# Altium PCB oscilostor.PcbDoc (part 1 of 2)
Units mm, origin at the board's own origin, x right, y up, seen from the top; angles counter-clockwise.
Board outline 113.66 x 82.55 mm, 2 copper layers (Top Layer, Bottom Layer); 162 components, 136 nets, 565 pads, 67 vias.
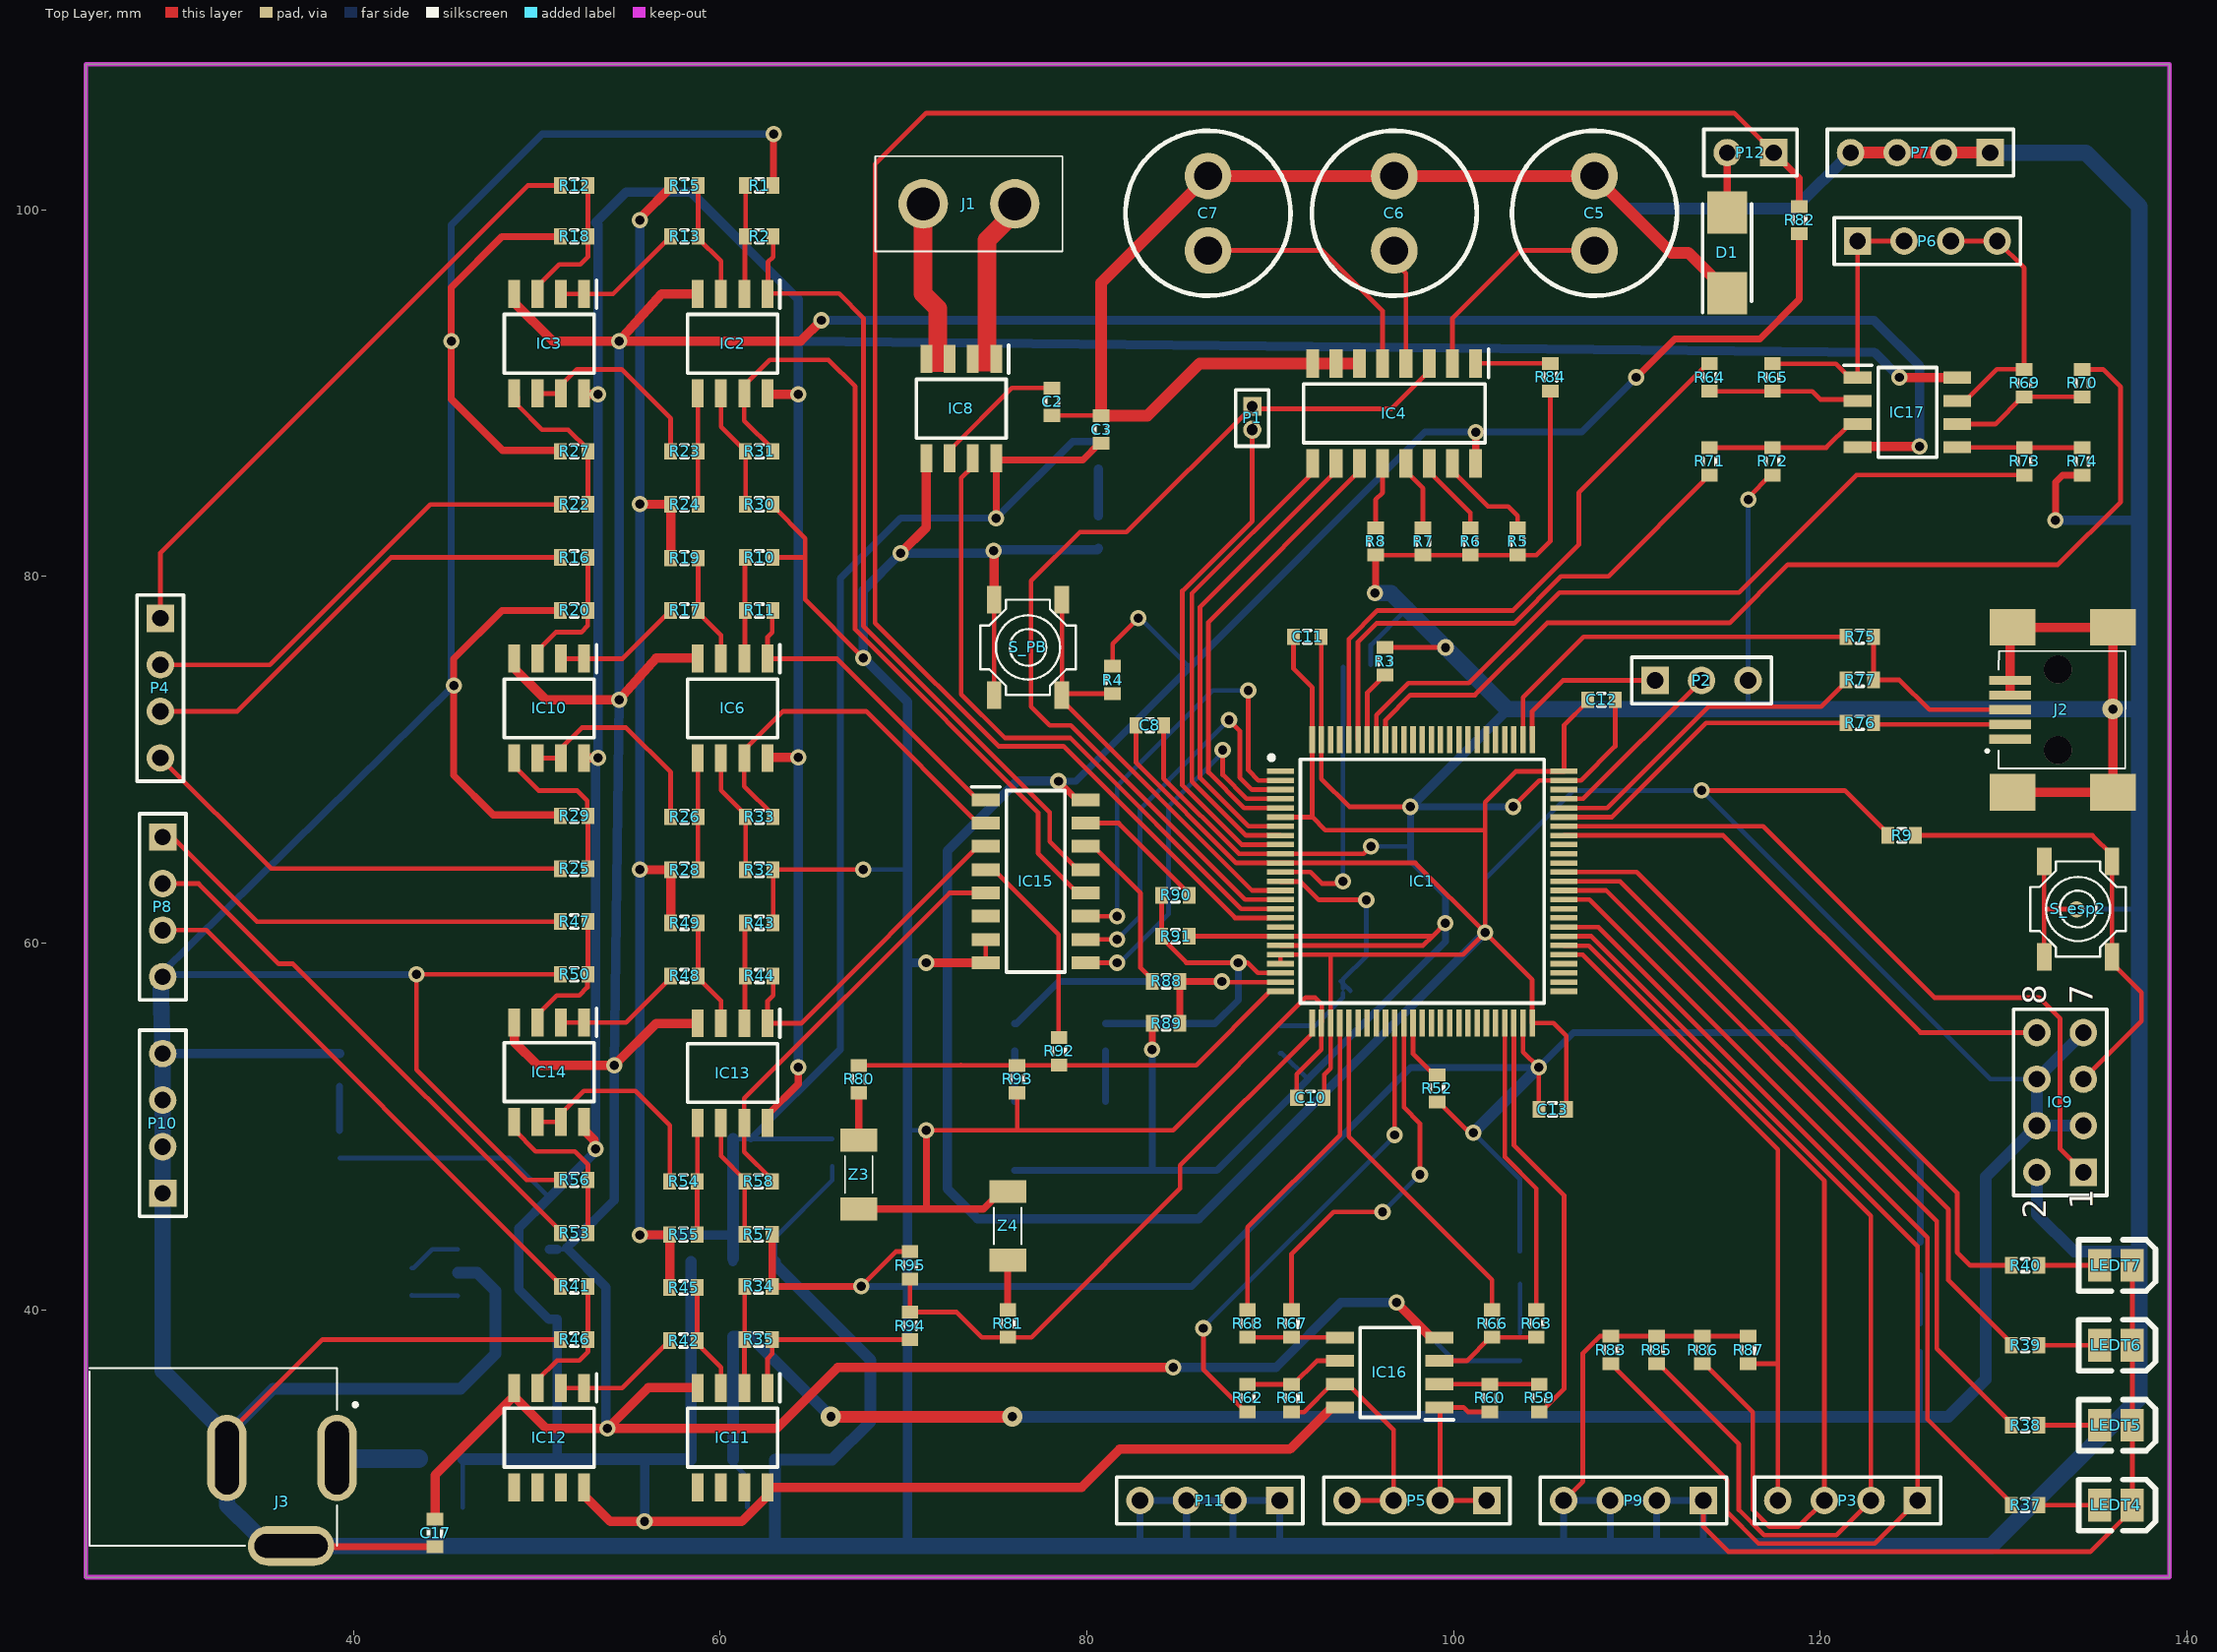
[diagram p0: Top Layer view]
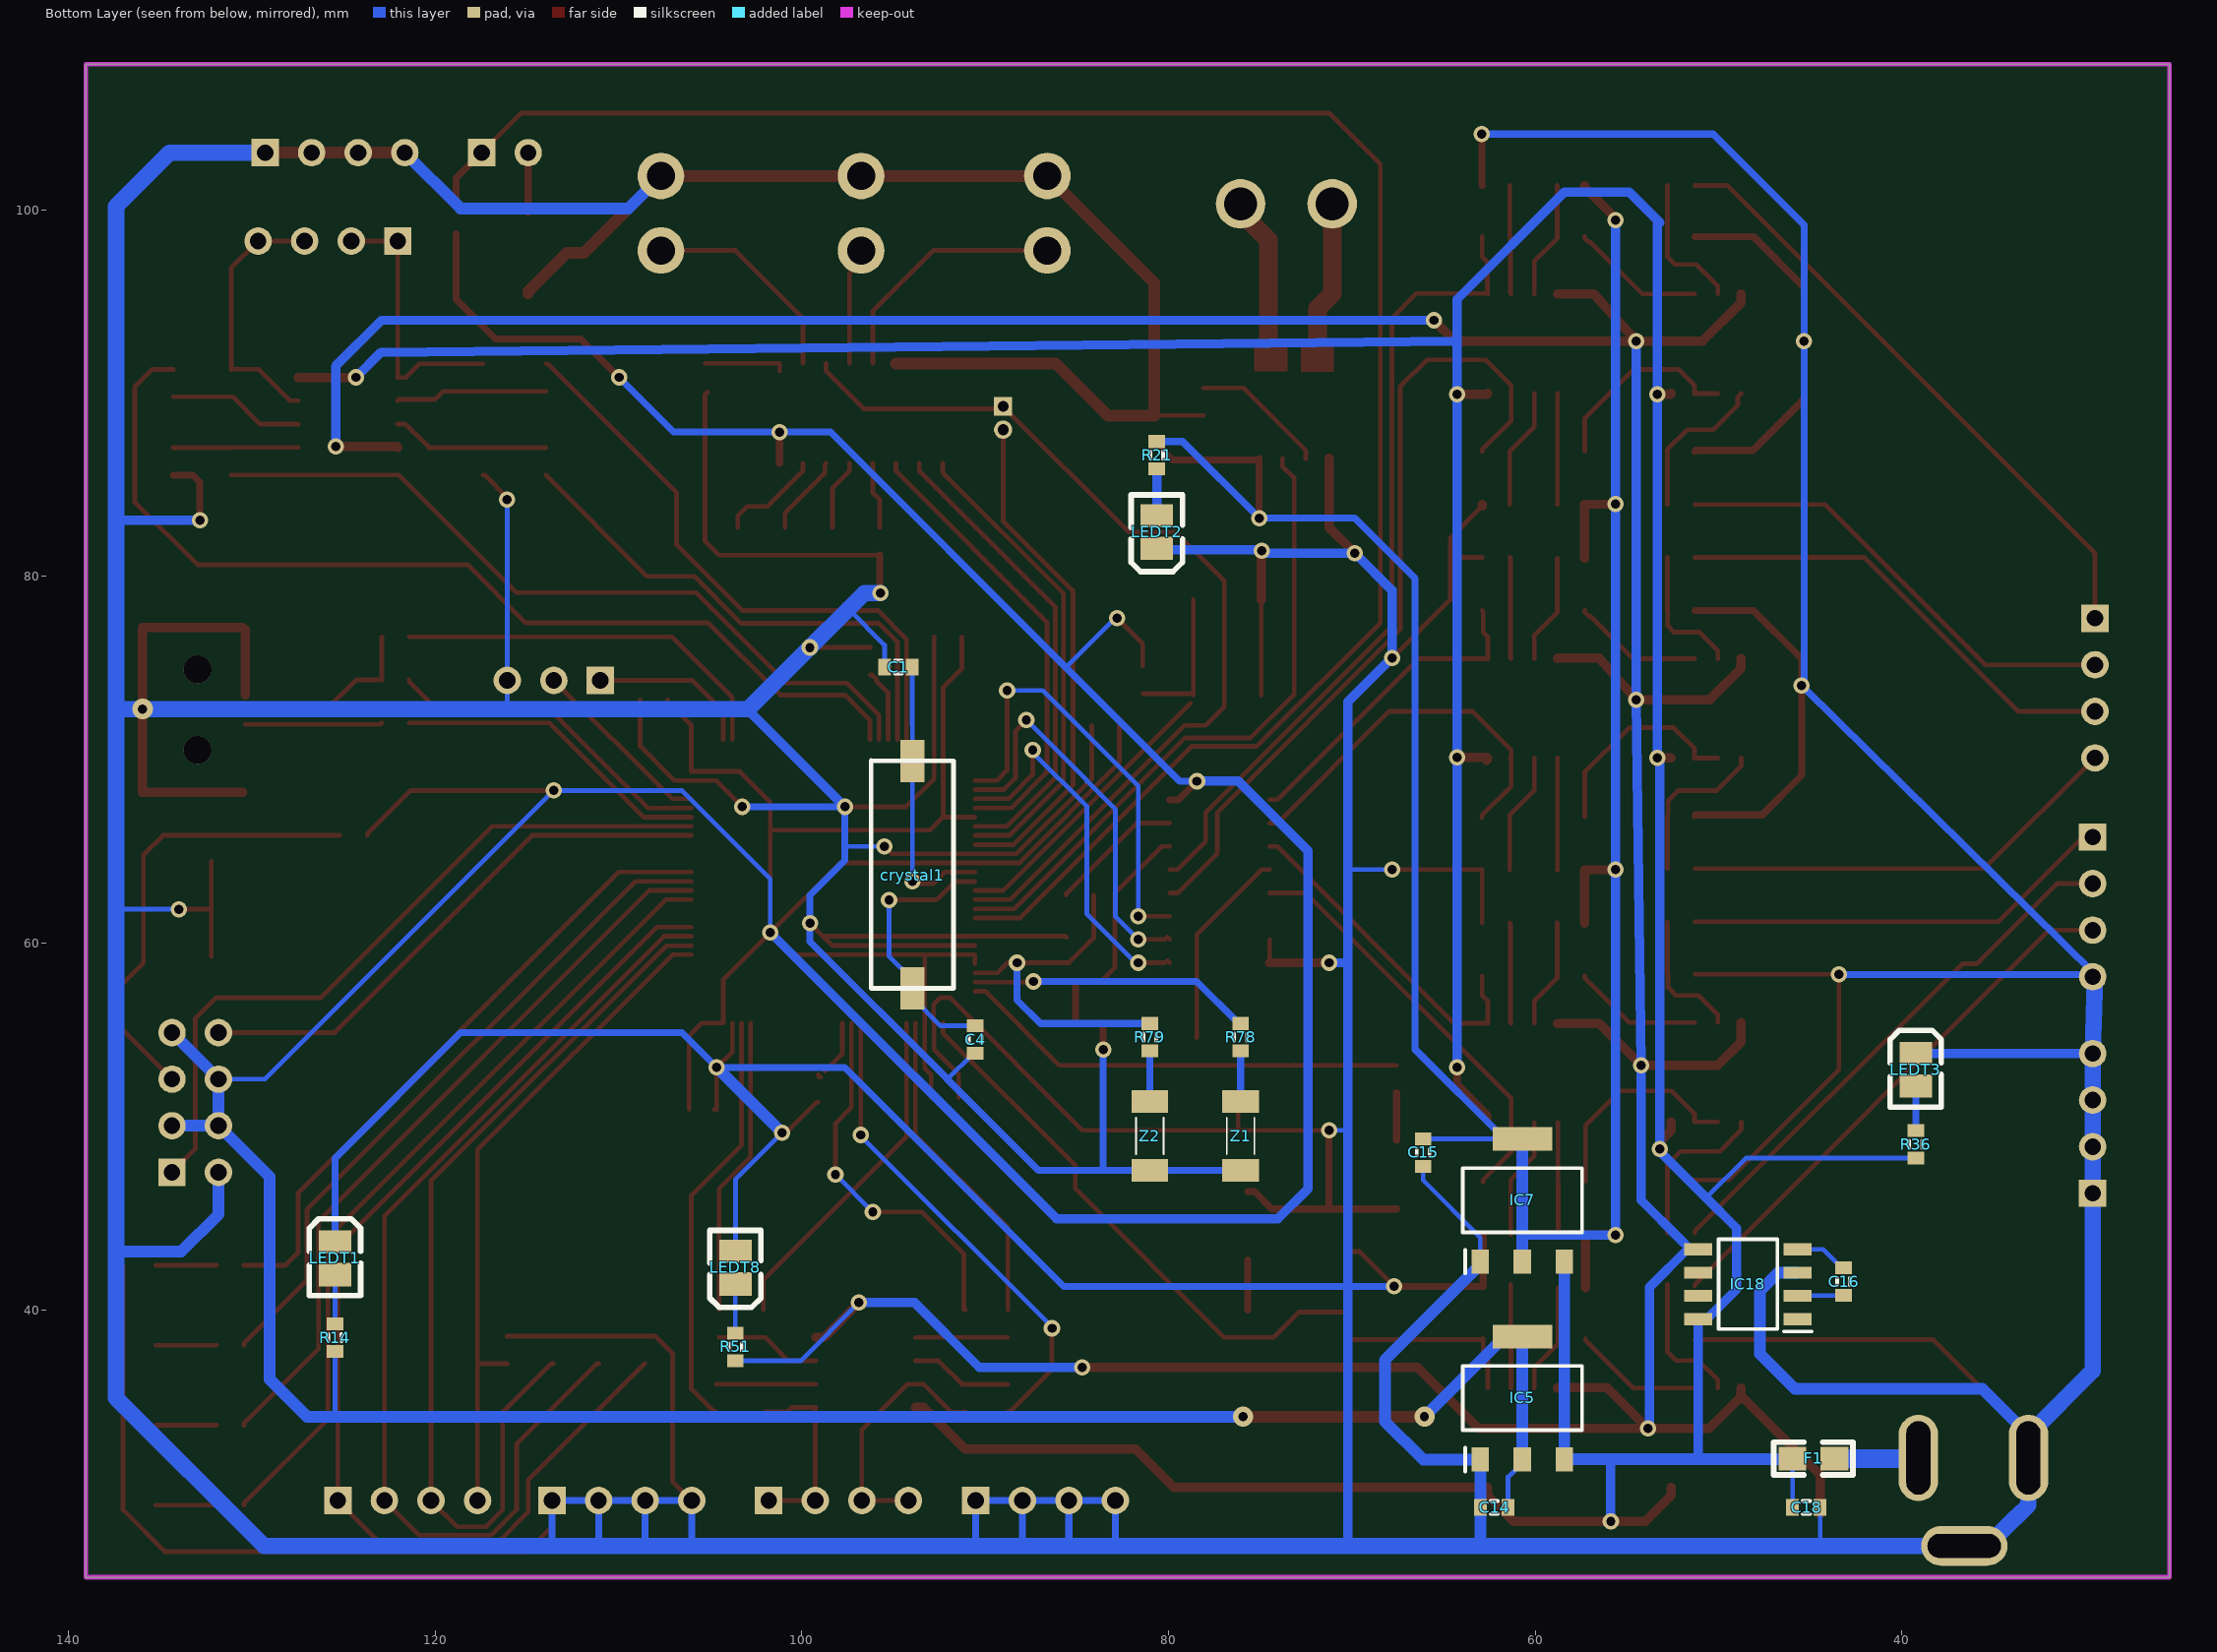
[diagram p1: Bottom Layer view, seen from below]

## Layer stack, top to bottom
Top Solder: solder mask 0.0102, Solder Resist, Dk 3.5
Top Layer: signal copper 0.0356
Dielectric 1: dielectric 0.32, FR-4, Dk 4.8
Bottom Layer: signal copper 0.0356
Bottom Solder: solder mask 0.0102, Solder Resist, Dk 3.5

## Board outline
25.4,25.4 139.065,25.4 139.065,107.95 25.4,107.95

## Design rules (kind name [scope] priority, off if disabled: settings)
Clearance [All] p1: gap=0.2 ignorepadtopadclearanceinfootprint=FALSE
PolygonConnect [All] p1: connectstyle=Relief reliefconductorwidth=0.254 reliefentries=4 polygonreliefangle="90 Angle" airgapwidth=0.254
RoutingVias [All] p1: holewidth=0.711 width=1.27 viastyle="Through Hole" minholewidth=0.711 minwidth=1.27 maxholewidth=0.711 maxwidth=1.27
SolderMaskExpansion [All] p1: expansion=0.102
Width [All] p1: maxlimit=1.27 minlimit=0.254 preferedwidth=0.254 minimp=50.000000 maximp=50.000000 favimp=50.000000
30 further rules are at their usual default settings.

## Components (designator, comment, footprint, x,y, rotation, side; value= is the part's Value field where it differs from the comment)
C1 "C0603" J1-0603 94.742,75.057 r180 bottom value=20pF
C2 "Cap" J1-0603 78.105,89.535 r90 top value=1nF
C3 "Cap" J1-0603 80.787,88.011 r270 top value=100nF
C4 "C0603" J1-0603 90.551,54.737 r90 bottom value=20pF
C5 "Cap" "Deep Cap gerdaloo" 107.696,101.85 r270 top value=47uF
C6 "Cap" "Deep Cap gerdaloo" 96.774,101.85 r270 top value=470uF
C7 "Cap" "Deep Cap gerdaloo" 86.614,101.85 r270 top value=2.2uF
C8 "C0603" J1-0603 83.439,71.882 r0 top value=0.1uF
C10 "C0603" J1-0603 92.202,51.562 r180 top value=0.1uF
C11 "C0603" J1-0603 92.031,76.708 r0 top value=0.1uF
C12 "C0603" J1-0603 108.077,73.279 r0 top value=0.1uF
C13 "C0603" J1-0603 105.41,50.927 r180 top value=0.1uF
C14 "C0603" J1-0603 62.23,29.21 r0 bottom value=0.1uF
C15 "C0603" J1-0603 66.119,48.574 r270 bottom value=0.1uF
C16 "Cap" J1-0603 43.18,41.529 r270 bottom value=10uF
C17 "Cap" J1-0603 44.45,27.813 r90 top value=10uF
C18 "C0603" J1-0603 45.212,29.21 r180 bottom value=10uF
crystal1 "clockProducerDeep" "smd CRYSTAL" 91.73,69.931 r0 bottom
D1 "1N4007" DIOM5327X242N 114.935,97.663 r90 top
F1 "Fuse 1" 0805 44.831,31.877 r0 bottom
IC1 "STM32F103VCT6" QFP50P1600X1600X160-100N 98.298,63.373 r0 top
IC2 "LM2904D" SOIC127P600X175-8N 60.682,92.698 r270 top
IC3 "LM2904D" SOIC127P600X175-8N 50.673,92.698 r270 top
IC4 "74HC4051D" SOIC127P600X175-16N 96.774,88.9 r270 top
IC5 "AMS1117-3.3" SOT229P700X180-4N 60.706,35.179 r90 bottom
IC6 "LM2904D" SOIC127P600X175-8N 60.682,72.805 r270 top
IC7 "AMS1117-5" SOT229P700X180-4N 60.706,45.974 r90 bottom
IC8 "ACS712ELCTR-05B-T" SOIC127P600X175-8N 73.152,89.154 r270 top
IC9 "ESP-01" HDR2X4 134.366,47.498 r90 top
IC10 "LM2904D" SOIC127P600X175-8N 50.673,72.805 r270 top
IC11 "LM2904D" SOIC127P600X175-8N 60.682,33.02 r270 top
IC12 "LM2904D" SOIC127P600X175-8N 50.673,33.02 r270 top
IC13 "LM2904D" SOIC127P600X175-8N 60.682,52.913 r270 top
IC14 "LM2904D" SOIC127P600X175-8N 50.673,52.959 r270 top
IC15 "74HC4053D" SOIC127P600X175-16N 77.216,63.373 r0 top
IC16 "LM2904D" SOIC127P600X175-8N 96.52,36.576 r180 top
IC17 "LM2904D" SOIC127P600X175-8N 124.77,88.95 r0 top
IC18 "ICL7660ACBAZA" SOIC127P600X175-8N 48.399,41.39 r0 bottom
J1 "XT30PB" XT30PB 76.073,100.33 r270 top
J2 "usb type B" 0474910001 129.869,71.13 r180 top
J3 "1613_20" 161320 34.798,31.115 r0 top
LEDT1 "" 3518 125.476,42.799 r90 bottom
LEDT2 "" 3518 80.645,82.423 r270 bottom
LEDT3 "" 3518 39.243,53.086 r90 bottom
LEDT4 "" 3518 136.144,29.337 r0 top
LEDT5 "" 3518 136.144,33.697 r0 top
LEDT6 "" 3518 136.144,38.058 r0 top
LEDT7 "" 3518 136.144,42.418 r0 top
LEDT8 "" 3518 103.632,42.291 r270 bottom
P1 "MHDR1X2" MHDR1X2 89.027,89.281 r270 top
P2 "Header 3" HDR1X3 110.998,74.33 r0 top
P3 "Header 4" HDR1X4 125.317,29.591 r180 top
P4 "Header 4" HDR1X4 29.464,77.724 r270 top
P5 "Header 4" HDR1X4 101.814,29.591 r180 top
P6 "Header 4" HDR1X4 122.047,98.298 r0 top
P7 "Header 4" HDR1X4 129.286,103.124 r180 top
P8 "Header 4" HDR1X4 29.591,65.786 r270 top
P9 "Header 4" HDR1X4 113.633,29.591 r180 top
P10 "Header 4" HDR1X4 29.591,46.355 r90 top
P11 "Header 4" HDR1X4 90.519,29.591 r180 top
P12 "Header 2" HDR1X2 117.475,103.124 r180 top
R1 "Res1" J1-0603 62.139,101.329 r0 top value=24.9K
R2 "Res1" J1-0603 62.139,98.552 r180 top value=8.2K
R3 "Res1" J1-0603 96.266,75.376 r90 top value=10K
R4 "Res1" J1-0603 81.407,74.358 r90 top value=10K
R5 "Res1" J1-0603 103.505,81.915 r270 top value=10k
R6 "Res1" J1-0603 100.923,81.915 r270 top value=1.5k
R7 "Res1" J1-0603 98.34,81.915 r270 top value=330
R8 "Res1" J1-0603 95.758,81.915 r270 top value=100K
R9 "Res1" J1-0603 124.46,65.873 r180 top value=10K
R10 "Res1" J1-0603 62.139,81.041 r0 top value=24.9K
R11 "Res1" J1-0603 62.139,78.147 r180 top value=8.2K
R12 "Res1" J1-0603 52.046,101.329 r0 top value=1M
R13 "Res1" J1-0603 58.051,98.552 r0 top value=10K
R14 "Res1" j1-0603 125.476,38.469 r90 bottom value=330
R15 "Res1" J1-0603 58.051,101.329 r0 top value=10K
R16 "Res1" J1-0603 52.046,81.041 r0 top value=1M
R17 "Res1" J1-0603 58.051,78.147 r0 top value=10K
R18 "Res1" J1-0603 52.046,98.552 r0 top value=1M
R19 "Res1" J1-0603 58.051,81.005 r0 top value=10K
R20 "Res1" J1-0603 52.046,78.147 r0 top value=1M
R21 "Res1" j1-0603 80.645,86.614 r270 bottom value=330
R22 "Res1" J1-0603 52.046,83.934 r0 top value=1M
R23 "Res1" J1-0603 58.051,86.828 r0 top value=10K
R24 "Res1" J1-0603 58.051,83.934 r0 top value=10K
R25 "Res1" J1-0603 52.046,64.06 r0 top value=1M
R26 "Res1" J1-0603 58.051,66.887 r0 top value=10K
R27 "Res1" J1-0603 52.046,86.828 r0 top value=100K
R28 "Res1" J1-0603 58.051,63.993 r0 top value=10K
R29 "Res1" J1-0603 52.046,66.945 r0 top value=100K
R30 "Res1" J1-0603 62.139,83.934 r0 top value=24.9K
R31 "Res1" J1-0603 62.139,86.828 r180 top value=8.2K
R32 "Res1" J1-0603 62.139,63.993 r0 top value=24.9K
R33 "Res1" J1-0603 62.139,66.887 r180 top value=8.2K
R34 "Res1" J1-0603 62.091,41.274 r0 top value=24.9K
R35 "Res1" J1-0603 62.091,38.371 r180 top value=8.2K
R36 "Res1" j1-0603 39.243,49.022 r90 bottom value=330
R37 "Res1" j1-0603 131.191,29.337 r0 top value=330
R38 "Res1" j1-0603 131.191,33.697 r0 top value=330
R39 "Res1" j1-0603 131.191,38.058 r0 top value=330
R40 "Res1" j1-0603 131.191,42.418 r0 top value=330
R41 "Res1" J1-0603 52.046,41.274 r0 top value=1M
R42 "Res1" J1-0603 58.003,38.313 r0 top value=10K
R43 "Res1" J1-0603 62.139,61.1 r0 top value=24.9K
R44 "Res1" J1-0603 62.139,58.206 r180 top value=8.2K
R45 "Res1" J1-0603 58.003,41.207 r0 top value=10K
R46 "Res1" J1-0603 52.046,38.371 r0 top value=1M
R47 "Res1" J1-0603 52.046,61.176 r0 top value=1M
R48 "Res1" J1-0603 58.051,58.206 r0 top value=10K
R49 "Res1" J1-0603 58.051,61.1 r0 top value=10K
R50 "Res1" J1-0603 52.046,58.291 r0 top value=1M
R51 "Res1" j1-0603 103.632,37.973 r90 bottom value=330
R52 "Res1" J1-0603 99.108,52.07 r270 top value=10K
R53 "Res1" J1-0603 52.046,44.177 r0 top value=1M
R54 "Res1" J1-0603 58.003,46.994 r0 top value=10K
R55 "Res1" J1-0603 58.003,44.101 r0 top value=10K
R56 "Res1" J1-0603 52.046,47.08 r0 top value=100K
R57 "Res1" J1-0603 62.091,44.107 r0 top value=24.9K
R58 "Res1" J1-0603 62.091,46.992 r180 top value=8.2K
R59 "Res1" J1-0603 104.687,35.179 r90 top value=33K
R60 "Res1" J1-0603 101.981,35.179 r90 top value=75K
R61 "Res1" J1-0603 91.174,35.179 r270 top value=75K
R62 "Res1" J1-0603 88.773,35.179 r270 top value=33K
R63 "Res1" J1-0603 104.521,39.243 r270 top value=25K
R64 "Res1" J1-0603 113.975,90.855 r270 top value=33K
R65 "Res1" J1-0603 117.404,90.855 r270 top value=75K
R66 "Res1" J1-0603 102.108,39.243 r270 top value=10K
R67 "Res1" J1-0603 91.174,39.243 r90 top value=25K
R68 "Res1" J1-0603 88.773,39.243 r270 top value=10K
R69 "Res1" J1-0603 131.138,90.551 r90 top value=75K
R70 "Res1" J1-0603 134.295,90.551 r90 top value=33K
R71 "Res1" J1-0603 113.975,86.283 r90 top value=10K
R72 "Res1" J1-0603 117.404,86.283 r90 top value=25K
R73 "Res1" J1-0603 131.144,86.283 r270 top value=10K
R74 "Res1" J1-0603 134.295,86.283 r90 top value=25K
R75 "Res1" J1-0603 122.174,76.708 r180 top value=1.5k
R76 "Res1" J1-0603 122.174,72.009 r180 top value=22
R77 "Res1" J1-0603 122.174,74.358 r180 top value=22
R78 "Res1" J1-0603 76.073,54.864 r90 bottom value=330
R79 "Res1" J1-0603 81.026,54.864 r90 bottom value=330
R80 "Res1" J1-0603 67.564,52.578 r90 top value=330
R81 "Res1" J1-0603 75.692,39.243 r270 top value=330
R82 "Res1" J1-0603 118.872,99.441 r270 top value=1K
R83 "Res1" J1-0603 108.585,37.805 r270 top value=10K
R84 "Res1" J1-0603 105.283,90.875 r90 top value=1M
R85 "Res1" J1-0603 111.083,37.805 r270 top value=10K
R86 "Res1" J1-0603 113.58,37.805 r270 top value=10K
R87 "Res1" J1-0603 116.078,37.805 r270 top value=10K
R88 "Res1" J1-0603 84.328,57.912 r0 top value=10K
R89 "Res1" J1-0603 84.328,55.626 r180 top value=10K
R90 "Res1" J1-0603 84.836,62.611 r180 top value=10K
R91 "Res1" J1-0603 84.836,60.373 r0 top value=10K
R92 "Res1" J1-0603 78.486,54.102 r270 top value=10K
R93 "Res1" J1-0603 76.2,52.578 r270 top value=10K
R94 "Res1" J1-0603 70.358,39.116 r90 top value=10K
R95 "Res1" J1-0603 70.358,42.418 r90 top value=10K
S_esp2 "SW-PB" button 133.985,61.873 r270 top
S_PB "SW-PB" button 76.705,76.146 r270 top
Z1 "diode" TZMC4V7GS08 76.073,49.479 r90 bottom
Z2 "diode" TZMC4V7GS08 81.026,49.479 r90 bottom
Z3 "diode" TZMC4V7GS08 67.564,47.371 r90 top
Z4 "diode" TZMC4V7GS08 75.692,44.577 r270 top

## Footprints (in the part's own frame and the unit in brackets; to place one, negate y for a bottom-side part, rotate by r counter-clockwise, add the part's x,y. Pads: shape width x height; smd on the part's side, far side on the other; paste and mask are expansions set on the pad)
0805 [mil]
  rect 60x50 smd: 1(-45,0) 2(45,0)
  silkscreen extent -85,-35 85,35
3518 [mil]
  rect 50x70 smd: 1(35,0) 2(-35,0)
  silkscreen extent -80,-55 85,55
161320 [mm]
  oval 2.159x4.699 hole 4 slot 1.3 at 0 deg: 1(4.3,0.8) 3(-1.7,0.8)
  oval 4.699x2.159 hole 1.3 slot 4 at 0 deg: 2(1.8,-4)
  silkscreen extent -9.2,-4 5.4,5.7
0474910001 [mm]
  rect 2.3x0.5 smd: 1(-0.5,0) 2(-0.5,-0.8) 3(-0.5,-1.6) 4(-0.5,-2.4) 5(-0.5,-3.2)
  round 1.524 hole 1.524: 7(-3.1,0.6) 8(-3.1,-3.8)
  rect 2.5x2 smd: MP1(-6.1,2.9) MP2(-0.625,2.9) MP3(-0.625,-6.1) MP4(-6.1,-6.1)
  silkscreen extent -6.8,-4.8 0.8,1.6
button [mm]
  rect 1.5x0.8 smd: 1(-2.587,1.939) 1(2.613,1.939) 2(-2.587,-1.761) 2(2.613,-1.761)
  silkscreen extent -2.59,-2.51 2.61,2.69, body extent -2.59,-2.51 2.64,2.69, height 2.2
"Deep Cap gerdaloo" [mil]
  round 100 hole 60: 1(0,0) 2(160,0)
  silkscreen extent -97,-177 257,177
DIOM5327X242N [mm]
  rect 2.3x2.15 smd: 1(-2.2,0) 2(2.2,0)
  silkscreen extent -3.27,-1.34 2.65,1.34, body extent -2.65,-1.34 2.65,1.34, height 2.42
HDR1X2 [mm] "Connector; Header; 2 Position"
  rect 1.5x1.5 hole 0.9: 1(0,0)
  round 1.5 hole 0.9: 2(2.54,0)
  silkscreen extent -1.27,-1.27 3.81,1.27
HDR1X3 [mm] "Connector; Header; 3 Position"
  rect 1.5x1.5 hole 0.9: 1(0,0)
  round 1.5 hole 0.9: 2(2.54,0) 3(5.08,0)
  silkscreen extent -1.27,-1.27 6.35,1.27
HDR1X4 [mm] "Connector; Header; 4 Position"
  rect 1.5x1.5 hole 0.9: 1(0,0)
  round 1.5 hole 0.9: 2(2.54,0) 3(5.08,0) 4(7.62,0)
  silkscreen extent -1.27,-1.27 8.89,1.27
HDR2X4 [mm] "Connector; Header; 4x2 Position"
  rect 1.5x1.5 hole 0.9: 1(0,0)
  round 1.5 hole 0.9: 2(0,2.54) 3(2.54,0) 4(2.54,2.54) 5(5.08,0) 6(5.08,2.54) 7(7.62,0) 8(7.62,2.54)
  silkscreen extent -1.27,-1.27 8.89,3.81
J1-0603 [mm] "Chip Resistor, Body 1.6x0.8mm, IPC High Density"
  rect 0.7x0.9 smd: 1(-0.75,0) 2(0.75,0)
  silkscreen extent -0.2,-0.35 0.2,0.35, body extent -0.85,-0.48 0.85,0.48, height 0.9
j1-0603 [mm] "Chip Resistor, Body 1.6x0.8mm, IPC High Density"
  rect 0.7x0.9 smd: 1(-0.75,0) 2(0.75,0)
  silkscreen extent -0.2,-0.35 0.2,0.35, body extent -0.85,-0.48 0.85,0.48, height 0.9
MHDR1X2 [mm] "Connector; Header; 2 Position"
  rect 1x1 hole 0.6: 1(0,0)
  round 1 hole 0.6: 2(1.27,0)
  silkscreen extent -0.9,-0.9 2.17,0.9
QFP50P1600X1600X160-100N [mm]
  rect 1.475x0.3 smd: 1(-7.738,6) 2(-7.738,5.5) 3(-7.738,5) 4(-7.738,4.5) 5(-7.738,4) 6(-7.738,3.5) 7(-7.738,3) 8(-7.738,2.5) 9(-7.738,2) 10(-7.738,1.5) 11(-7.738,1) 12(-7.738,0.5) 13(-7.738,0) 14(-7.738,-0.5) 15(-7.738,-1) 16(-7.738,-1.5) 17(-7.738,-2) 18(-7.738,-2.5) 19(-7.738,-3) 20(-7.738,-3.5) 21(-7.738,-4) 22(-7.738,-4.5) 23(-7.738,-5) 24(-7.738,-5.5) 25(-7.738,-6) 51(7.738,-6) 52(7.738,-5.5) 53(7.738,-5) 54(7.738,-4.5) 55(7.738,-4) 56(7.738,-3.5) 57(7.738,-3) 58(7.738,-2.5) 59(7.738,-2) 60(7.738,-1.5) 61(7.738,-1) 62(7.738,-0.5) 63(7.738,0) 64(7.738,0.5) 65(7.738,1) 66(7.738,1.5) 67(7.738,2) 68(7.738,2.5) 69(7.738,3) 70(7.738,3.5) 71(7.738,4) 72(7.738,4.5) 73(7.738,5) 74(7.738,5.5) 75(7.738,6)
  rect 0.3x1.475 smd: 26(-6,-7.738) 27(-5.5,-7.738) 28(-5,-7.738) 29(-4.5,-7.738) 30(-4,-7.738) 31(-3.5,-7.738) 32(-3,-7.738) 33(-2.5,-7.738) 34(-2,-7.738) 35(-1.5,-7.738) 36(-1,-7.738) 37(-0.5,-7.738) 38(0,-7.738) 39(0.5,-7.738) 40(1,-7.738) 41(1.5,-7.738) 42(2,-7.738) 43(2.5,-7.738) 44(3,-7.738) 45(3.5,-7.738) 46(4,-7.738) 47(4.5,-7.738) 48(5,-7.738) 49(5.5,-7.738) 50(6,-7.738) 76(6,7.738) 77(5.5,7.738) 78(5,7.738) 79(4.5,7.738) 80(4,7.738) 81(3.5,7.738) 82(3,7.738) 83(2.5,7.738) 84(2,7.738) 85(1.5,7.738) 86(1,7.738) 87(0.5,7.738) 88(0,7.738) 89(-0.5,7.738) 90(-1,7.738) 91(-1.5,7.738) 92(-2,7.738) 93(-2.5,7.738) 94(-3,7.738) 95(-3.5,7.738) 96(-4,7.738) 97(-4.5,7.738) 98(-5,7.738) 99(-5.5,7.738) 100(-6,7.738)
  silkscreen extent -8.35,-6.65 6.65,6.87, body extent -8,-8 8,8, height 1.6
"smd CRYSTAL" [mm]
  rect 1.3x2.3 smd: 1(2.25,0) 2(2.25,12.4)
  silkscreen extent 0,-0.03 4.5,12.4
SOIC127P600X175-8N [mm]
  rect 1.525x0.65 smd: 1(-2.712,1.905) 2(-2.712,0.635) 3(-2.712,-0.635) 4(-2.712,-1.905) 5(2.712,-1.905) 6(2.712,-0.635) 7(2.712,0.635) 8(2.712,1.905)
  silkscreen extent -3.47,-2.45 1.6,2.58, body extent -3,-2.45 3,2.45, height 1.75
SOIC127P600X175-16N [mm]
  rect 1.55x0.7 smd: 1(-2.725,4.445) 2(-2.725,3.175) 3(-2.725,1.905) 4(-2.725,0.635) 5(-2.725,-0.635) 6(-2.725,-1.905) 7(-2.725,-3.175) 8(-2.725,-4.445) 9(2.725,-4.445) 10(2.725,-3.175) 11(2.725,-1.905) 12(2.725,-0.635) 13(2.725,0.635) 14(2.725,1.905) 15(2.725,3.175) 16(2.725,4.445)
  silkscreen extent -3.5,-4.95 1.6,5.15, body extent -3,-4.95 3,4.95, height 1.75
SOT229P700X180-4N [mm]
  rect 1.3x0.95 smd: 1(-3.35,2.29) 2(-3.35,0) 3(-3.35,-2.29)
  rect 1.3x3.25 smd: 4(3.35,0)
  silkscreen extent -4,-3.25 1.75,3.25, body extent -3.5,-3.25 3.5,3.25, height 1.8
TZMC4V7GS08 [mm]
  rect 1.25x2 smd: 1(-1.875,0) 2(1.875,0)
  silkscreen extent -1,-0.75 1,0.75
XT30PB [mm]
  round 2.7 hole 1.8: 1(0,0) 2(0,-5)
  silkscreen extent -2.6,-7.6 2.6,2.6, body extent -2.6,-7.6 2.6,2.6, height 10.66

## Part data
C1 C4 C8 C10 C11 C12 C13 C14 C15 C18: "Ceramic Chip Capacitor - Standard", PackageDocument=Mar-2001, Code_IPC="1608 [0603]", Code_JEITA=0603, ComponentLink1Description="Manufacturer Link", ComponentLink1URL=http://www.kemet.com/, ComponentLink2Description=Datasheet, ComponentLink2URL=http://www.kemet.com/kemet/web/homepage/kechome.nsf/vapubfilesname/F3102TA.pdf/$file/F3102TA.pdf, DatasheetDocument=Mar-2001, LatestRevisionDate=19-Mar-2004, LatestRevisionNote="Silkscreen size reduced.", Note="Footprint corresponds to dimensions for bulk cassette packaging. This case size has tightened tolerances.", PackageReference=0603, Published=17-Jul-2002, Publisher="Altium Limited"
C2 C3 C5 C6 C7 C16 C17: "Capacitor", LatestRevisionDate=17-Jul-2002, LatestRevisionNote="Re-released for DXP Platform.", PackageDescription="Radial Cap, Thru-Hole; 2 Leads; 0.3 in Pin Spacing", PackageReference=RAD-0.3, Published=8-Jun-2000, Publisher="Altium Limited"
crystal1: library part "deep crystal"
D1: "Diode", Manufacturer_Name=Shikues, Datasheet Link=https://datasheet.lcsc.com/szlcsc/SK-1N4007_C126233.pdf, Height=2.42mm, Manufacturer_Part_Number=1N4007
F1: "Fuse", LatestRevisionDate=17-Jul-2002, LatestRevisionNote="Re-released for DXP Platform.", PackageDescription="Thru-Hole; 2 Leads", PackageReference=PIN-W2/E2.8, Published=8-Jun-2000, Publisher="Altium Limited"
IC1: "Integrated Circuit", Manufacturer_Name=STMicroelectronics, Mouser Part Number=511-STM32F103VCT6, Arrow Part Number=STM32F103VCT6, Arrow Price/Stock=https://www.arrow.com/en/products/stm32f103vct6/stmicroelectronics, Datasheet Link=https://www.st.com/resource/en/datasheet/stm32f103rc.pdf, Height=1.6mm, Manufacturer_Part_Number=STM32F103VCT6, Mouser Price/Stock=https://www.mouser.co.uk/ProductDetail/STMicroelectronics/STM32F103VCT6?qs=%252BB84zevwoRDW1rpMEiZMCg%3D%3D
IC2 IC3 IC6 IC10 IC11 IC12 IC13 IC14 IC16 IC17: "Integrated Circuit", Manufacturer_Name="Texas Instruments", Mouser Part Number=595-LM2904D, Arrow Part Number=LM2904D, Arrow Price/Stock=https://www.arrow.com/en/products/lm2904d/texas-instruments, Datasheet Link=http://www.ti.com/lit/ds/symlink/lm2904.pdf, Height=1.75mm, Manufacturer_Part_Number=LM2904D, Mouser Price/Stock=https://www.mouser.co.uk/ProductDetail/Texas-Instruments/LM2904D?qs=3pnr37ZAbK8kLA26cC%252BYEg%3D%3D
IC4: "Integrated Circuit", Manufacturer_Name=Nexperia, Mouser Part Number=N/A, Datasheet Link=https://assets.nexperia.com/documents/data-sheet/74HC_HCT4051.pdf, Height=1.75mm, Manufacturer_Part_Number=74HC4051D, Mouser Price/Stock=https://www.mouser.com/Search/Refine.aspx?Keyword=N%2FA
IC5 IC7: library part AMS1117-1.5, "Integrated Circuit", Manufacturer_Name=ams, Datasheet Link=http://www.advanced-monolithic.com/pdf/ds1117.pdf, Height=1.8mm, Manufacturer_Part_Number=AMS1117-1.5
IC8: "Integrated Circuit", Manufacturer_Name="Sharp Microelectronics", Datasheet Link=https://www.allegromicro.com/~/media/Files/Datasheets/ACS712-Datasheet.ashx, Height=1.75mm, Manufacturer_Part_Number=ACS712ELCTR-05B-T
IC9: "Integrated Circuit", Manufacturer_Name=Ai-Thinker, Datasheet Link=http://wiki.ai-thinker.com/_media/esp8266/esp8266_series_modules_user_manual_v1.1.pdf, Height=2mm, Manufacturer_Part_Number=ESP-01
IC15: "Integrated Circuit", Manufacturer_Name=Toshiba, Mouser Part Number=757-74HC4053D, Datasheet Link=http://toshiba.semicon-storage.com/info/docget.jsp?did=54976&prodName=74HC4053D, Height=1.75mm, Manufacturer_Part_Number=74HC4053D, Mouser Price/Stock=https://www.mouser.co.uk/ProductDetail/Toshiba/74HC4053D/?qs=xhbEVWpZdWclq3MrSw2ZoQ%3D%3D
IC18: "Integrated Circuit", Manufacturer_Name="Renesas Electronics", Mouser Part Number=968-ICL7660ACBAZA, Datasheet Link=https://www.renesas.com/en-us/www/doc/datasheet/icl7660s-a.pdf, Height=1.75mm, Manufacturer_Part_Number=ICL7660ACBAZA, Mouser Price/Stock=https://www.mouser.co.uk/ProductDetail/Renesas-Intersil/ICL7660ACBAZA?qs=9fLuogzTs8LeW4me0pfrFQ%3D%3D
J1: "Connector", Manufacturer_Name=Amass, Datasheet Link=https://www.tme.eu/Document/4acc913878197f8c2e30d4b8cdc47230/XT30UPB%20SPEC.pdf, Height=10.7mm, Manufacturer_Part_Number=XT30PB
J2: library part 0474910001, "Connector", Manufacturer_Name=Molex, Arrow Part Number=0474910001, Arrow Price/Stock=https://www.arrow.com/en/products/0474910001/molex, Datasheet Link=https://www.molex.com/pdm_docs/sd/474910001_sd.pdf, Height=2.94mm, Manufacturer_Part_Number=0474910001
J3: "Connector", Manufacturer_Name=LUMBERG, Manufacturer_Part_Number="1613 20", Datasheet Link=http://www.farnell.com/datasheets/2349122.pdf, Height=7mm
LEDT1 LEDT2 LEDT3 LEDT4 LEDT5 LEDT6 LEDT7 LEDT8: library part LED3, "Typical BLUE SiC LED", PackageDocument=16-Apr-2002, DatasheetDocument=16-Apr-2002, LatestRevisionDate=17-Dec-2003, LatestRevisionNote="PCB Footprint replaced.", PackageReference=3.5X2.8X1.9, Published=8-Jun-2000, Publisher="Altium Limited"
P1 P12: "Header, 2-Pin", LatestRevisionDate=17-Jul-2002, LatestRevisionNote="Re-released for DXP Platform.", Publisher="Altium Limited"
P2: "Header, 3-Pin", LatestRevisionDate=17-Jul-2002, LatestRevisionNote="Re-released for DXP Platform.", Publisher="Altium Limited"
P3 P4 P5 P6 P7 P8 P9 P10 P11: "Header, 4-Pin", LatestRevisionDate=17-Jul-2002, LatestRevisionNote="Re-released for DXP Platform.", Publisher="Altium Limited"
R1 R2 R3 R4 R5 R6 R7 R8 R9 R10 R11 R12 R13 R14 R15 R16 R17 R18 R19 R20 R21 R22 R23 R24 R25 R26 R27 R28 R29 R30 R31 R32 R33 R34 R35 R36 R37 R38 R39 R40 R41 R42 R43 R44 R45 R46 R47 R48 R49 R50 R51 R52 R53 R54 R55 R56 R57 R58 R59 R60 R61 R62 R63 R64 R65 R66 R67 R68 R69 R70 R71 R72 R73 R74 R75 R76 R77 R78 R79 R80 R81 R82 R83 R84 R85 R86 R87 R88 R89 R90 R91 R92 R93 R94 R95: "Resistor", LatestRevisionDate=17-Jul-2002, LatestRevisionNote="Re-released for DXP Platform.", PackageReference=AXIAL-0.3, Published=8-Jun-2000, Publisher="Altium Limited"
  R1 R2 R3 R4 R5 R6 R7 R8 R9 R10 R11 R12 R13 R15 R16 R17 R18 R19 R20 R22 R23 R24 R25 R26 R27 R28 R29 R30 R31 R32 R33 R34 R35 R41 R42 R43 R44 R45 R46 R47 R48 R49 R50 R52 R53 R54 R55 R56 R57 R58 R59 R60 R61 R62 R63 R64 R65 R66 R67 R68 R69 R70 R71 R72 R73 R74 R75 R76 R77 R78 R79 R80 R81 R82 R83 R84 R85 R86 R87 R88 R89 R90 R91 R92 R93 R94 R95: PackageDescription="Axial Device, Thru-Hole; 2 Leads; 0.3 in Pin Spacing"
S_esp2 S_PB: "Switch", LatestRevisionDate=17-Jul-2002, LatestRevisionNote="Re-released for DXP Platform.", PackageReference=SPST-2, Published=24-Mar-1999, Publisher="Altium Limited"
Z1 Z2 Z3 Z4: library part TZMC4V7-GS08, "Zener Diode", Manufacturer_Name=Vishay, Mouser Part Number=78-TZMC4.7, Arrow Part Number=TZMC4V7-GS08, Arrow Price/Stock=https://www.arrow.com/en/products/tzmc4v7-gs08/vishay, Datasheet Link=https://www.vishay.com/docs/84122/tzm.pdf, Manufacturer_Part_Number=TZMC4V7-GS08, Mouser Price/Stock=https://www.mouser.com/Search/Refine.aspx?Keyword=78-TZMC4.7

## Via types
v1: diameter 0.889, hole 0.508, Top Layer to Bottom Layer, 48 vias
v2: diameter 0.9, hole 0.5, Top Layer to Bottom Layer, 16 vias
v3: diameter 1.1, hole 0.5, Top Layer to Bottom Layer, 2 vias
v4: diameter 1.143, hole 0.5, Top Layer to Bottom Layer, 1 vias

## Nets (pads, with @x,y where several pads share a name; then routed paths per layer and width w, separated by ;. In a path a pad name is that pad's centre, name@x,y a point inside that pad or via, vN(x,y) a via of type N, cw(c..) or ccw(c..) an arc to the next point about the centre after c; other vN are vias at no path point)
+3.3v: C8.1 C10.1 C11.1 C12.1 C13.1 C14.1 IC1.6 IC1.11 IC1.21 IC1.22 IC1.28 IC1.50 IC1.75 IC1.100 IC4.16 IC5.2 IC5.4 IC9.3 IC9.4 IC9.6 IC9.7 IC15.16 R4.2 R9.2 R14.1 R82.2 | length 384.3
  Top Layer w0.254: R4.2 81.407,76.327 v1(82.804,77.724) ; C8.1 82.689,69.845 88.161,64.373 IC1.11 97.933,64.373 v1(101.727,60.579) ; IC1.22 IC1.21 93.298,59.373 ; IC1.6 92.284,66.873 92.298,66.887 ; C11.1 91.281,74.962 92.298,73.945 IC1.100 92.298,66.887 ; C10.1 92.952,52.832 93.298,53.178 IC1.28 93.298,59.373 ; C13.1 106.16,54.943 105.468,55.635 IC1.50 104.298,58.008 v1(101.727,60.579) ; C12.1 107.327,73.179 106.036,71.888 IC1.75 103.409,69.373 101.727,67.691 101.727,66.167 ; v1(113.538,68.326) 121.357,68.326 123.71,65.973 R9.2 ; 92.298,66.887 93.018,66.167 101.727,66.167 ; 93.298,59.373 100.521,59.373 v1(101.727,60.579) ; v1(101.727,60.579) 101.727,66.167
  Top Layer w0.381: v2(78.455,68.834) 79.471,67.818 IC15.16 ; IC4.16 v1(101.219,87.884) ; v1(109.982,90.866) 112.08,92.964 116.713,92.964 118.872,95.123 R82.2
  Top Layer w0.635: v3(66.047,34.163) v3(75.946,34.163)
  Bottom Layer w0.254: IC5.2 60.706,31.654 61.48,30.88 C14.1 ; v1(82.804,77.724) 82.907,77.724 85.598,75.033 ; v1(101.727,60.579) 101.727,63.5 106.553,68.326 v1(113.538,68.326) 129.286,52.578 IC9.6 ; 125.476,34.163 R14.1
  Bottom Layer w0.381: v2(78.455,68.834) 79.399,68.834 85.598,75.033 98.449,87.884 v1(101.219,87.884) 107,87.884 v1(109.982,90.866)
  Bottom Layer w0.508: v2(78.455,68.834) 76.2,68.834 72.39,65.024 72.39,46.609 74.041,44.958 86.106,44.958 v1(101.727,60.579)
  Bottom Layer w0.635: IC5.2 IC5.4 61.681,38.529 v3(66.047,34.163) ; v3(75.946,34.163) 125.476,34.163 127,34.163 129.032,36.195 129.032,47.244 IC9.4 ; IC9.3 IC9.4 ; IC9.7 IC9.6 IC9.4
+5v: C3.2 C15.1 IC7.2 IC7.4 IC8.8 R15.1 R19.1 R21.1 R24.1 R28.1 R45.1 R49.1 R55.1 | length 147.9
  Top Layer w0.381: v1(75.057,83.185) IC8.8 ; IC8.8@75.12,86.378 75.139,86.36 79.786,86.36 80.687,87.261 C3.2
  Top Layer w0.508: v1(55.626,44.069) 55.642,44.085 57.237,44.085 R55.1 R45.1 ; v1(55.626,64.008) 55.633,64.001 57.294,64.001 R28.1 R49.1 ; v1(55.626,83.947) 55.632,83.941 57.295,83.941 R24.1 R19.1 ; v1(55.626,99.441) 55.699,99.514 55.699,99.627 57.301,101.229 R15.1
  Bottom Layer w0.254: IC7.4 61.681,49.324 C15.1
  Bottom Layer w0.381: IC7.4@61.681,49.324 66.548,54.191 66.548,79.883 69.85,83.185 v1(75.057,83.185) 79.236,87.364 R21.1
  Bottom Layer w0.508: v1(55.626,99.441) v1(55.626,83.947) v1(55.626,64.008) v1(55.626,44.069) 60.706,44.069 ; IC7.2 IC7.2@60.706,42.799
  Bottom Layer w0.635: IC7.2@60.706,42.799 60.706,44.069 IC7.4
+9v: C18.1 F1.2 IC2.8 IC3.8 IC5.3 IC6.8 IC7.3 IC10.8 IC11.8 IC12.8 IC13.8 IC14.8 IC16.8 IC17.8 IC18.8 R36.1 | length 287.6
  Top Layer w0.381: IC13.8 62.587,50.638 64.262,52.313 v1(64.262,53.213)
  Top Layer w0.508: IC12.8 52.578,29.87 54,28.448 v2(55.88,28.448) 61.187,28.448 62.587,29.848 IC11.8 79.711,30.308 81.788,32.385 91.084,32.385 93.37,34.671 IC16.8 ; IC14.8 52.578,49.809 53.14,49.247 53.14,48.841 v1(53.213,48.768) ; IC10.8 52.589,70.104 v1(53.34,70.104) ; IC3.8 52.614,89.95 v1(53.34,89.95) ; IC6.8 IC6.8@62.587,70.053 ; IC2.8 62.623,89.95 v1(64.262,89.95) ; IC6.8@62.658,69.977 62.587,70.048 IC6.8@62.587,70.053 ; v1(64.262,70.124) 62.658,70.124 IC6.8@62.587,70.053 ; v1(124.333,90.866) 124.338,90.861 127.477,90.861 IC17.8
  Bottom Layer w0.254: R36.1 48.502,48.272 50.673,46.101 ; C18.1 45.962,31.865 F1.2
  Bottom Layer w0.508: 51.111,31.853 IC18.8 50.651,39.485 49.022,41.114 49.022,44.45 50.673,46.101 53.213,48.641 v1(53.213,48.768) 53.213,69.977 v1(53.34,70.104) v1(53.34,89.95) 53.34,99.187 53.213,99.314 54.864,100.965 58.42,100.965 64.262,95.123 64.262,92.833 ; v2(55.88,28.448) 55.88,31.853 ; v1(64.262,53.213) v1(64.262,70.124) v1(64.262,89.95) 64.262,92.833 ; v1(124.333,90.866) 122.973,92.227 64.262,92.833
  Bottom Layer w0.635: F1.2 45.998,31.853 51.111,31.853 55.88,31.853 58.392,31.853 IC5.3 IC7.3
-9v: C17.2 IC2.4 IC3.4 IC6.4 IC10.4 IC11.4 IC12.4 IC13.4 IC14.4 IC16.4 IC17.4 IC18.5 R51.1 | length 257.4
  Top Layer w0.508: C17.2@44.45,28.817 44.45,30.977 IC12.4@48.768,35.295 ; IC12.4 IC12.4@48.768,35.295 ; IC14.4 48.768,54.61 50.037,53.341 v1(54.229,53.341) 56.513,55.625 IC13.4 ; IC10.4 48.768,74.99 50.479,73.279 v1(54.483,73.279) 56.515,75.565 58.729,75.565 IC6.4 ; IC3.4 48.768,94.95 50.881,92.837 v1(54.483,92.837) ; IC11.4 58.765,35.744 56.076,35.744 v1(53.86,33.528) ; IC2.4 56.802,95.41 v1(54.483,92.837) ; v1(65.532,93.98) 64.389,92.837 v1(54.483,92.837) ; v1(84.709,36.854) 66.421,36.854 63.095,33.528 v1(53.86,33.528) ; v1(96.901,40.386) 96.901,40.375 98.795,38.481 IC16.4 ; IC17.4 122.096,87.084 v1(125.438,87.084) ; IC12.4@48.768,35.295 48.768,35.272 50.512,33.528 v1(53.86,33.528)
  Bottom Layer w0.254: IC18.5 IC18.5@51.549,43.295 ; 52.07,43.816 52.084,43.816 ; 53.733,40.755 53.764,40.724 53.848,40.64 53.845,40.64 ; v1(96.901,40.386) 100.076,37.211 103.62,37.211 R51.1
  Bottom Layer w0.508: IC18.5@50.674,43.295 IC18.5 ; v1(53.86,33.528) 53.764,33.624 53.764,40.724 53.764,41.232 51.625,43.371 52.07,43.816 54.229,45.975 v1(54.229,53.341) v1(54.483,73.279) v1(54.483,92.837) ; v1(65.532,93.98) 122.936,93.98 125.438,91.478 v1(125.438,87.084) ; v1(84.709,36.854) 90.321,36.854 93.853,40.386 v1(96.901,40.386)
AnalogIn1b: P4.1 R12.1 | length 33.7
  Top Layer w0.254: P4.1 29.464,81.28 49.513,101.329 R12.1
AnalogIn1s: P4.2 R22.1 | length 25.5
  Top Layer w0.254: P4.2 35.433,75.184 44.183,83.934 R22.1
AnalogIn2b: P4.3 R16.1 | length 25.3
  Top Layer w0.254: P4.3 33.655,72.644 42.052,81.041 R16.1
AnalogIn2s: P4.4 R25.1 | length 24.3
  Top Layer w0.254: P4.4 35.508,64.06 R25.1
AnalogIn3b: P8.1 R47.1 | length 23.6
  Top Layer w0.254: P8.1 30.123,65.786 34.733,61.176 R47.1
AnalogIn3s: P8.2 R53.1 | length 29.7
  Top Layer w0.254: P8.2 31.556,63.246 35.932,58.87 36.703,58.87 51.296,44.277 R53.1
AnalogIn4s: P8.3 R41.1 | length 29.8
  Top Layer w0.254: P8.3 31.964,60.706 51.296,41.374 R41.1
analogOut1PWM1: IC1.95 R71.1 | length 28.3
  Top Layer w0.254: IC1.95 94.798,76.443 95.799,77.445 103.311,77.445 105.876,80.01 108.458,80.01 108.458,80.016 R71.1
analogOut1PWM2: IC1.96 R64.1 | length 33
  Top Layer w0.254: IC1.96 94.298,76.585 95.86,78.147 103.26,78.147 106.842,81.728 106.842,84.572 113.875,91.605 R64.1
analogOut2PWM1: IC1.92 R70.2 | length 54.9
  Top Layer w0.254: IC1.92 96.298,72.178 97.653,73.533 101.177,73.533 105.114,77.47 115.062,77.47 118.237,80.645 132.969,80.645 136.398,84.074 136.398,90.331 135.428,91.301 R70.2
analogOut2PWM2: IC1.93 R73.2 | length 42.1
  Top Layer w0.254: IC1.93 95.798,72.43 97.548,74.18 100.85,74.18 105.791,79.121 115.57,79.121 121.982,85.533 R73.2
analogVoltageOut1: IC17.1 P6.1 P6.2 R65.1 | length 15
  Top Layer w0.254: R65.1 120.87,91.605 121.62,90.855 IC17.1 122.047,90.866 P6.1 P6.2
analogVoltageOut2: IC17.7 P6.3 P6.4 R69.2 | length 14.5
  Top Layer w0.254: P6.3 P6.4 131.138,96.827 R69.2 131.126,91.313 129.647,91.313 127.92,89.585 IC17.7
BOOT1: IC1.37 R52.1 | length 3.1
  Top Layer w0.254: IC1.37 97.798,53.963 R52.1@98.745,53.016 ; R52.1@98.968,52.693 R52.1@99.068,52.693 ; R52.1 R52.1@99.116,52.828
channel1Out1: IC2.7 IC15.12 R31.1 | length 44.6
  Top Layer w0.254: R31.1 62.889,86.928 61.317,88.5 IC2.7 61.317,90.424 62.714,91.821 65.913,91.821 67.364,90.37 67.364,77.11 77.343,67.131 77.343,64.911 79.516,62.738 IC15.12
channel1Out2: IC2.1 IC15.13 R2.1 | length 44.4
  Top Layer w0.254: IC2.1 IC2.1@62.611,95.434 ; R2.1 62.889,97.433 62.611,97.155 IC2.1@62.611,95.434 ; IC15.13 79.516,64.008 77.978,65.546 77.978,67.138 67.818,77.298 67.818,94.107 66.479,95.446 62.623,95.446 IC2.1@62.611,95.434
channel1Select: IC1.2 IC15.11 | length 24.5
  Top Layer w0.254: IC15.11 v2(81.661,61.468) ; v2(88.812,73.787) 88.812,69.43 89.369,68.873 IC1.2
  Bottom Layer w0.254: v2(81.661,61.468) 81.661,68.58 86.868,73.787 v2(88.812,73.787)
channel2Out1: IC6.7 IC15.2 R33.1 | length 21
  Top Layer w0.254: IC6.7@61.353,70.057 IC6.7 ; R33.1@62.925,66.851 R33.1 62.889,66.987 61.317,68.559 IC6.7 ; IC15.2 74.066,66.548 67.97,72.644 63.43,72.644 61.317,70.531 IC6.7
channel2Out2: IC6.1 IC15.1 R11.1 | length 17.8
  Top Layer w0.254: R11.1 62.841,78.099 62.841,76.962 62.587,76.708 IC6.1 66.367,75.517 74.066,67.818 IC15.1
channel2Select: IC1.3 IC15.10 | length 22.2
  Top Layer w0.254: IC15.10 80.068,60.325 80.195,60.198 v2(81.661,60.198) ; v2(87.757,72.178) 88.349,71.586 88.349,69.043 89.019,68.373 IC1.3
  Bottom Layer w0.254: v2(81.661,60.198) 82.899,61.436 82.899,67.278 84.455,68.834 84.455,68.866 87.757,72.168 v2(87.757,72.178)
channel3Out1: IC13.7 IC15.5 R58.1 | length 23
  Top Layer w0.254: IC13.7@61.329,50.189 IC13.7 ; R58.1@62.853,46.98 R58.1 62.841,47.092 61.317,48.616 IC13.7 ; IC15.5 72.517,62.738 61.317,51.538 IC13.7
channel3Out2: IC13.1 IC15.3 R44.1 | length 18.6
  Top Layer w0.254: R44.1 62.889,57.15 62.587,56.848 IC13.1 64.413,55.625 74.066,65.278 IC15.3
channel3Select: IC1.4 IC15.9 | length 20.9
  Top Layer w0.254: IC15.9 80.068,59.055 80.195,58.928 v2(81.661,58.928) ; v2(87.415,70.53) 87.415,69.183 88.725,67.873 IC1.4
  Bottom Layer w0.254: v2(81.661,58.928) 81.804,58.928 84.455,61.579 84.455,67.437 87.415,70.397 v2(87.415,70.53)
connectionADC: IC1.17 P12.1 R82.1 | length 108.4
  Top Layer w0.254: IC1.17 88.086,61.373 78.72,70.739 75.184,70.739 68.453,77.47 68.453,102.489 71.247,105.283 115.316,105.283 P12.1
  Top Layer w0.381: P12.1 118.872,101.727 R82.1
currentMeterADC: IC1.16 IC8.7 | length 35.4
  Top Layer w0.254: IC8.7 73.787,86.004 73.152,85.369 73.152,73.573 75.532,71.193 79.103,71.193 88.423,61.873 IC1.16
currentMeterIn+: IC8.1 IC8.2 J1.1 | length 8.9
  Top Layer w1.016: 74.549,92.062 74.549,98.35 76.073,99.874 J1.1
currentMeterIn-: IC8.3 IC8.4 J1.2 | length 8.8
  Top Layer w1.016: J1.2 71.073,95.424 71.882,94.615 71.882,91.866
Dac1PWM1: IC1.47 R63.1 | length 16.4
  Top Layer w0.254: IC1.47 102.798,48.332 104.521,46.609 R63.1
Dac1PWM2: IC1.48 R59.1 | length 23
  Top Layer w0.254: IC1.48 103.298,48.975 106.036,46.237 106.036,35.678 104.787,34.429 R59.1
Dac2PWM1: IC1.36 R67.2 | length 20.6
  Top Layer w0.254: R67.2@91.074,39.993 R67.2 91.174,43.041 93.472,45.339 v2(96.139,45.339) ; IC1.36 97.298,51.038 98.171,50.165 v2(98.171,47.371)
  Bottom Layer w0.254: v2(96.139,45.339) v2(98.171,47.371)
Dac2PWM2: IC1.35 R62.2 | length 26.6
  Top Layer w0.254: v2(86.36,38.989) 86.36,36.742 88.673,34.429 R62.2 ; v2(96.798,49.53) 96.799,49.531 96.799,55.634 IC1.35
  Bottom Layer w0.254: v2(86.36,38.989) 86.36,39.041 96.798,49.479 v2(96.798,49.53)
DacIn1: IC1.30 R66.1 | length 18.9
  Top Layer w0.254: IC1.30 94.298,49.446 102.108,41.636 R66.1
DacIn2: IC1.29 R68.1 | length 17.7
  Top Layer w0.254: R68.1 88.773,44.495 93.808,49.53 93.808,55.625 IC1.29
DacOut1: IC16.1 P5.1 P5.2 R60.1 | length 10.5
  Top Layer w0.254: P5.1 P5.2 99.274,34.629 IC16.1 100.556,34.671 100.798,34.429 R60.1
DacOut2: IC16.7 P5.3 P5.4 R61.2 | length 13.7
  Top Layer w0.254: R61.2@91.074,34.429 R61.2 91.168,34.423 91.174,34.417 91.846,34.417 93.37,35.941 IC16.7 ; IC16.7@93.802,35.935 IC16.7 ; P5.4 P5.3 96.734,33.452 94.245,35.941 IC16.7
DigitalIn1: IC1.58 P3.1 R83.2 | length 63.2
  Top Layer w0.254: IC1.58 106.043,60.866 107.917,60.866 125.317,43.466 P3.1 122.977,27.251 116.64,27.251 114.935,28.956 114.935,30.705 R83.2
DigitalIn2: IC1.57 P3.2 R85.2 | length 57
  Top Layer w0.254: IC1.57 107.52,60.373 122.777,45.116 P3.2 120.891,27.705 116.948,27.705 115.57,29.083 115.57,32.668 111.183,37.055 R85.2
DigitalIn3: IC1.56 P3.3 R86.2 | length 51
  Top Layer w0.254: IC1.56 106.059,59.85 107.401,59.85 120.237,47.014 P3.3 118.805,28.159 117.256,28.159 116.332,29.083 116.332,34.404 113.68,37.055 R86.2
DigitalIn4: IC1.55 P3.4 R87.2 | length 36.8
  Top Layer w0.254: IC1.55 107.055,59.373 117.697,48.731 117.697,37.084 ; R87.2 117.668,37.055 117.697,37.084 ; P3.4 117.697,37.084
ESP_Rx: IC1.68 IC9.8 | length 30.2
  Top Layer w0.254: IC1.68 114.721,65.873 125.476,55.118 IC9.8
ESP_Tx: IC1.69 IC9.1 | length 40.3
  Top Layer w0.254: IC1.69 116.888,66.373 126.238,57.023 131.953,57.023 133.096,55.88 133.096,48.768 IC9.1
GND: C1.1 C2.1 C3.1 C4.1 C5.1 C6.1 C7.1 C8.2 C10.2 C11.2 C12.2 C13.2 C14.2 C15.2 C17.1 C18.2 D1.1 IC1.10 IC1.19 IC1.20 IC1.27 IC1.49 IC1.74 IC1.99 IC4.6 IC4.7 IC4.8 IC5.1 IC7.1 IC8.5 IC9.2 IC15.7 IC15.8 IC18.3 J2.4 J2.5 J2.MP1 J2.MP2 J2.MP3 J2.MP4 J3.2 J3.3 LEDT1.1 LEDT2.1 LEDT3.1 LEDT4.1 LEDT5.1 LEDT6.1 LEDT7.1 LEDT8.2 P2.3 P7.1 P7.2 P7.3 P7.4 P8.4 P9.1 P9.2 P9.3 P9.4 P10.1 P10.2 P10.3 P10.4 P11.1 P11.2 P11.3 P11.4 R1.2 R3.2 R5.2 R6.2 R7.2 R8.2 R10.2 R18.1 R20.1 R27.1 R29.1 R30.2 R32.2 R34.2 R43.2 R46.1 R50.1 R52.2 R56.1 R57.2 R72.1 R74.1 R83.1 R84.1 R85.1 R86.1 R87.1 R89.2 R91.2 R93.2 R95.2 S_esp2.2 S_PB.2 Z1.1 Z2.1 Z3.1 Z4.1 | length 1151.2
  Top Layer w0.254: J3.3 33.098,33.165 38.304,38.371 R46.1 ; R56.1 49.44,47.08 43.434,53.086 43.434,58.291 R50.1 ; R43.2 R32.2 62.904,64.008 v1(67.818,64.008) ; R10.2 64.628,81.041 64.643,81.026 ; R30.2@62.889,83.834 64.643,82.08 64.643,81.026 ; v1(67.69,41.274) 69.584,43.168 R95.2 ; v1(67.818,75.565) 64.643,78.74 64.643,81.026 ; v1(71.247,49.784) 76.2,49.784 ; 72.644,58.928 72.746,58.826 ; IC15.8 IC15.7 ; S_PB.2@74.944,73.533 S_PB.2@74.944,78.733 ; R93.2 76.2,49.784 ; C2.1 80.763,88.785 C3.1 80.787,88.773 80.784,88.773 C3.1@80.772,88.785 ; C8.2 84.189,68.987 88.303,64.873 IC1.10 95.099,64.873 v1(95.504,65.278) ; R91.2@85.586,60.325 85.634,60.373 IC1.19 98.854,60.373 ; IC1.20 98.354,59.873 98.854,60.373 ; C10.2 91.452,52.844 92.798,54.19 IC1.27 92.781,55.652 92.818,55.688 92.818,56.662 92.456,57.023 91.947,57.023 84.708,49.784 76.2,49.784 ; C11.2 92.79,76.7 92.79,71.119 IC1.99 92.798,68.961 94.322,67.437 v1(97.663,67.437) ; R8.2 R7.2 R6.2 R5.2 104.533,81.165 105.283,81.915 105.283,89.928 R84.1@105.156,90.055 ; R3.2 v2(99.568,76.126) ; R52.2 99.208,51.32 100.75,49.779 100.97,49.779 v1(101.092,49.657) ; v1(99.568,61.087) 98.854,60.373 ; v1(103.251,67.437) 104.687,68.873 IC1.74 106.961,68.873 108.827,70.739 C12.2 ; IC1.49 103.798,54.063 v1(104.648,53.213) v1@104.654,53.207 ; C13.2 104.654,50.933 v1@104.654,53.207 ; C13.2@104.717,50.996 C13.2@104.787,50.927 ; v1@104.717,53.144 v1@104.654,53.207 ; P9.4 107.061,30.639 107.061,37.619 107.997,38.555 R83.1 R85.1 R86.1 R87.1 ; P9.1 113.633,28.172 115.008,26.797 134.747,26.797 137.033,29.083 LEDT4.1 LEDT5.1 LEDT6.1 LEDT7.1 ; v1(116.078,84.201) 116.078,84.307 117.304,85.533 R72.1 ; J2.MP3@130.369,77.105 J2.MP3 ; S_esp2.2@132.224,59.26 132.224,61.959 ; S_esp2.2@132.224,64.46 132.224,61.959 ; v1(133.985,61.849) 132.334,61.849 132.224,61.959
  Top Layer w0.381: J3.2 36.65,27.063 C17.1 ; R29.1 51.247,66.994 47.625,66.994 45.466,69.153 v1(45.466,74.041) 45.466,75.507 48.106,78.147 R20.1 ; R27.1 51.245,86.879 48.133,86.879 45.339,89.673 v1(45.339,92.837) 45.339,95.785 48.106,98.552 R18.1 ; R57.2 R34.2 v1(67.69,41.274) ; R1.2 62.907,101.347 62.907,104.122 v1(62.925,104.14) ; Z3.1 71.15,45.496 ; v1(71.247,49.784) 71.247,45.593 71.15,45.496 ; Z4.1 75.317,46.452 74.361,45.496 71.15,45.496 ; v2(83.566,54.19) 83.572,54.196 83.572,55.62 R89.2 ; v1(95.726,79.089) 95.758,79.121 R8.2 ; v1(132.842,83.058) 132.842,85.15 133.226,85.533 R74.1
  Top Layer w0.508: R30.2@62.889,83.834 R30.2 ; v1(69.85,81.28) 71.247,82.677 IC8.5 ; v1(71.247,58.928) 72.644,58.928 IC15.8 ; v1(74.93,81.407) 74.937,81.4 74.937,78.74 S_PB.2@74.944,78.733 ; J2.4 J2.5 J2.MP3@130.369,77.105 ; J2.MP2 J2.MP1 v4(135.969,72.771) J2.MP4 J2.MP3
  Top Layer w0.635: IC4.6 IC4.7 IC4.8 86.164,91.625 83.312,88.773 80.787,88.773 80.787,96.023 C7.1 C6.1 C5.1 111.883,97.663 112.81,97.663 114.935,95.538 D1.1 ; P7.4 P7.3 P7.2 P7.1
  Bottom Layer w0.254: 44.45,27.115 44.462,27.127 C18.2 ; IC7.1 62.996,43.942 66.119,47.065 C15.2 ; v1(67.818,64.008) 70.231,64.008 ; 70.231,49.784 v1(71.247,49.784) ; C4.1 90.651,53.987 92.06,52.578 ; C1.1@95.492,75.184 95.492,76.262 97.462,78.232 ; v1(95.504,65.278) 97.599,65.278 97.663,65.215 ; v1(101.092,49.657) 103.62,47.129 103.62,43.192 LEDT8.2 ; 116.078,72.771 P2.3 v1(116.078,84.201) ; v1(133.985,61.849) 137.287,61.849 137.414,61.722
  Bottom Layer w0.381: P8.4@29.464,58.281 P8.4@29.476,58.293 ; v1(43.434,58.293) 29.476,58.293 45.339,73.914 v1(45.339,92.837) 45.339,99.187 50.292,104.14 v1(62.925,104.14) ; v1(67.69,41.274) 70.105,41.274 70.231,41.148 ; 70.231,41.275 85.725,41.275 97.663,53.213 v1(104.648,53.213) 106.553,55.118 118.618,55.118 125.476,48.26 LEDT1.1 ; Z1.1 Z2.1 83.566,47.604 ; 82.804,27.115 82.899,27.21 P11.4 P11.3 ; v2(83.566,54.19) 83.566,47.604 ; 85.471,27.115 85.439,27.147 P11.3 ; 88.011,27.115 87.979,27.147 P11.2 ; 90.551,27.115 90.519,27.147 P11.1 P11.2 ; 92.06,52.578 99.568,60.086 v1(99.568,61.087) 99.568,62.611 97.663,64.516 97.663,65.215 v1(97.663,67.437) v1(103.251,67.437) ; 92.075,52.578 87.101,47.604 83.566,47.604 ; 106.045,27.115 106.013,27.147 P9.4 P9.3 ; 108.458,27.115 108.553,27.21 P9.3 ; 111.093,27.115 P9.2 ; 113.665,27.115 113.633,27.147 P9.1 P9.2 ; P11.3 P11.2 ; P9.3 P9.2
  Bottom Layer w0.508: P10.4 LEDT3.1 ; 70.231,27.115 70.231,41.148 70.231,41.275 70.231,49.784 70.231,58.928 ; v1(71.247,58.928) 70.231,58.928 ; LEDT2.1 80.581,81.471 74.993,81.471 v1(74.93,81.407) 74.803,81.28 v1(69.85,81.28) 67.818,79.248 v1(67.818,75.565) 70.231,73.152 70.231,64.008 70.231,58.928 ; v1(97.663,67.437) 102.923,72.697 ; v1(132.842,83.058) 137.287,83.058 137.414,83.185
  Bottom Layer w0.635: J3.3 33.098,33.165 35.62,35.687 45.847,35.687 47.752,37.592 47.752,41.021 46.748,42.025 IC18.3 ; 48.387,27.115 48.399,27.127 ; 62.992,27.115 62.869,27.238 62.996,27.365 IC5.1 66.119,31.829 68.199,33.909 68.199,37.246 62.996,42.449 IC7.1 ; v1(101.092,49.657) v1(104.648,53.213) ; C5.1 109.47,100.076 118.618,100.076 P7.4 ; IC9.2 131.826,45.212 133.858,43.18 137.414,43.18
  Bottom Layer w0.889: P8.4@29.464,58.281 29.468,58.162 P10.4 P10.3 P10.2 P10.1 29.591,36.672 J3.3@33.098,33.165 ; J3.3 33.098,29.337 33.727,28.708 33.755,28.708 35.348,27.115 J3.2 44.45,27.115 48.387,27.115 62.992,27.115 70.231,27.115 82.804,27.115 85.471,27.115 88.011,27.115 90.551,27.115 106.045,27.115 108.458,27.115 111.093,27.115 ; v1(95.726,79.089) 96.605,79.089 97.462,78.232 v2(99.568,76.126) 102.923,72.771 116.078,72.771 v4(135.969,72.771) 137.414,72.771 ; 111.157,27.115 113.665,27.115 129.35,27.115 137.414,35.179 137.414,43.18 137.414,61.722 137.414,72.771 ; P7.1 134.493,103.124 137.414,100.203 137.414,83.185 137.414,72.771
Micro_Reset: IC1.14 R4.1 S_PB.1 | length 24
  Top Layer w0.254: S_PB.1@78.644,78.733 78.644,73.533 78.719,73.608 R4.1 ; S_PB.1@78.803,73.088 89.019,62.873 IC1.14
NetC1_2: C1.2 crystal1.1 IC1.12 | length 15
  Top Layer w0.254: IC1.12 92.21,63.873 92.837,63.246 v1@93.599,63.246
  Bottom Layer w0.254: v1(93.98,63.373) 93.98,69.677 93.98,71.882 93.992,71.894 C1.2
NetC2_2: C2.2 IC8.6 | length 7.4
  Top Layer w0.254: IC8.6 72.517,86.879 75.923,90.285 C2.2
NetC4_2: C4.2 crystal1.2 IC1.13 | length 15.5
  Top Layer w0.254: IC1.13 90.583,63.35 91.67,63.35 92.663,62.357 v1(95.25,62.357)
  Bottom Layer w0.254: C4.2 92.444,55.487 93.98,57.023 crystal1.2@93.98,57.277 ; crystal1.2@93.859,57.918 crystal1.2@93.98,57.797 ; crystal1.2 crystal1.2@93.98,57.797 ; crystal1.2@94.373,57.404 crystal1.2@93.98,57.797 ; v1(95.25,62.357) 95.25,59.301 93.98,58.031 crystal1.2@93.98,57.797
NetC5_2: C5.2 IC4.2 | length 11.8
  Top Layer w0.254: IC4.2 99.949,94.107 103.628,97.786 C5.2
NetC6_2: C6.2 IC4.4 | length 6.4
  Top Layer w0.254: C6.2 96.774,97.167 97.409,96.532 IC4.4
NetC7_2: C7.2 IC4.5 | length 13.8
  Top Layer w0.254: C7.2 92.841,97.786 96.139,94.488 IC4.5
NetC16_1: C16.1 IC18.4 | length 2.9
  Bottom Layer w0.254: C16.1 43.28,42.279 44.296,43.295 IC18.4
NetC16_2: C16.2 IC18.2 | length 2.5
  Bottom Layer w0.254: C16.2 43.192,40.767 45.675,40.767 IC18.2
NetD1_2: D1.2 P12.2 | length 3.3
  Top Layer w0.381: D1.2 P12.2
NetF1_1: F1.1 J3.1 | length 4.5
  Bottom Layer w1.016: J3.1 39.136,31.877 F1.1@43.561,31.877
NetIC1_61: IC1.61 R37.1 | length 44
  Top Layer w0.254: IC1.61 107.426,62.373 125.857,43.942 125.857,34.021 130.441,29.437 R37.1
NetIC1_62: IC1.62 R38.1 | length 40.6
  Top Layer w0.254: IC1.62 108.323,62.873 126.365,44.831 126.365,37.873 130.441,33.797 R38.1
NetIC1_63: IC1.63 R39.1 | length 37.2
  Top Layer w0.254: IC1.63 109.093,63.373 127,45.466 127,41.599 130.441,38.158 R39.1
NetIC1_64: IC1.64 R40.1 | length 35.2
  Top Layer w0.254: IC1.64 109.99,63.873 127.482,46.381 127.482,43.13 128.194,42.418 R40.1
NetIC1_94: IC1.94 R3.1 | length 4
  Top Layer w0.254: IC1.94 95.298,73.658 95.943,74.303 95.943,74.403 96.166,74.626 R3.1
NetIC2_2: IC2.2 R1.1 R2.2 | length 5.9
  Top Layer w0.254: IC2.2 61.353,95.446 61.353,98.516 R2.2 R1.1
NetIC2_3: IC2.3 R13.2 R15.2 | length 6.4
  Top Layer w0.254: R15.2 R13.2 58.801,98.452 60.047,97.206 IC2.3
NetIC2_5: IC2.5 R23.2 R24.2 | length 6.1
  Top Layer w0.254: IC2.5 58.789,89.974 58.789,83.946 R24.2
NetIC2_6: IC2.6 R30.1 R31.2 | length 6.6
  Top Layer w0.254: IC2.6 60.047,88.17 R31.2 R30.1
NetIC3_1: IC3.1 IC3.2 R13.1 | length 7.4
  Top Layer w0.254: IC3.2 IC3.1 54.159,95.41 56.978,98.229 57.078,98.229 57.301,98.452 R13.1
NetIC3_3: IC3.3 R12.2 R18.2 | length 7.7
  Top Layer w0.254: IC3.3 50.038,95.848 51.218,97.028 52.378,97.028 52.796,97.446 R18.2 R12.2
NetIC3_5: IC3.5 R22.2 R27.2 | length 8.6
  Top Layer w0.254: IC3.5 48.952,89.802 48.952,89.351 50.292,88.011 51.713,88.011 52.796,86.928 R27.2 R22.2
NetIC3_6: IC3.6 IC3.7 R23.1 | length 11
  Top Layer w0.254: IC3.6 IC3.7 51.308,90.424 52.185,91.301 54.622,91.301 57.301,88.622 R23.1
NetIC4_1: IC4.1 R84.2 | length 4.5
  Top Layer w0.254: IC4.1@101.219,91.2 IC4.1 R84.2
NetIC4_12: IC4.12 R8.1 | length 3.7
  Top Layer w0.254: R8.1 95.758,84.201 96.139,84.582 IC4.12
NetIC4_13: IC4.13 R7.1 | length 3.9
  Top Layer w0.254: IC4.13 97.409,85.75 98.34,84.819 R7.1
NetIC4_14: IC4.14 R6.1 | length 4.4
  Top Layer w0.254: IC4.14 98.747,86.107 98.747,85.657 100.923,83.481 R6.1
NetIC4_15: IC4.15 R5.1 | length 5.6
  Top Layer w0.254: IC4.15 99.949,85.75 101.879,83.82 102.997,83.82 103.505,83.312 R5.1
NetIC6_2: IC6.2 R10.1 R11.2 | length 5.6
  Top Layer w0.254: IC6.2 61.353,75.553 61.353,81.005 R10.1
NetIC6_3: IC6.3 R17.2 R19.2 | length 6
  Top Layer w0.254: R19.2 R17.2 58.801,78.047 60.047,76.801 IC6.3
NetIC6_5: IC6.5 R26.2 R28.2 | length 6.1
  Top Layer w0.254: IC6.5 58.789,70.081 58.789,64.005 R28.2
NetIC6_6: IC6.6 R32.1 R33.2 | length 6.7
  Top Layer w0.254: IC6.6 60.047,68.329 61.389,66.987 R33.2 R32.1
NetIC10_1: IC10.1 IC10.2 R17.1 | length 7.1
  Top Layer w0.254: IC10.2 IC10.1 54.671,75.517 56.978,77.824 57.078,77.824 57.301,78.047 R17.1
NetIC10_3: IC10.3 R16.2 R20.2 | length 7.5
  Top Layer w0.254: IC10.3 50.038,75.955 51.045,76.962 52.429,76.962 52.783,77.316 52.783,78.134 R20.2 R16.2
NetIC10_5: IC10.5 R25.2 R29.2 | length 8.9
  Top Layer w0.254: IC10.5 48.768,69.656 50.098,68.326 52.197,68.326 52.747,67.776 52.747,66.994 R29.2 R25.2
NetIC10_6: IC10.6 IC10.7 R26.1 | length 11.7
  Top Layer w0.254: IC10.6 IC10.7 51.308,70.603 52.46,71.755 54.864,71.755 57.301,69.318 R26.1
NetIC11_2: IC11.2 R34.1 R35.2 | length 5.7
  Top Layer w0.254: IC11.2 61.329,35.744 61.329,38.41 61.341,38.422 R34.1@61.341,41.377
NetIC11_3: IC11.3 R42.2 R45.2 | length 6
  Top Layer w0.254: R45.2 R42.2 58.753,38.148 60.047,36.854 IC11.3
NetIC12_1: IC12.1 IC12.2 R42.1 | length 7.1
  Top Layer w0.254: IC12.2 IC12.1 54.662,35.732 57.253,38.323 R42.1@57.253,38.423
NetIC12_3: IC12.3 R41.2 R46.2 | length 7.5
  Top Layer w0.254: IC12.3 50.038,36.17 51.102,37.234 52.324,37.234 52.796,37.705 52.796,38.423 R41.2@52.796,41.377
NetIC13_2: IC13.2 R43.1 R44.2 | length 5.5
  Top Layer w0.254: IC13.2 61.353,55.661 61.353,61.064 R43.1
NetIC13_3: IC13.3 R48.2 R49.2 | length 6
  Top Layer w0.254: R49.2 R48.2 58.801,58.106 60.047,56.86 IC13.3
NetIC13_5: IC13.5 R54.2 R55.2 | length 6.1
  Top Layer w0.254: R55.2 R54.2 58.765,47.006 58.765,50.189 IC13.5
NetIC13_6: IC13.6 R57.1 R58.2 | length 6.6
  Top Layer w0.254: IC13.6 60.047,48.386 61.341,47.092 R58.2 R57.1
NetIC14_1: IC14.1 IC14.2 R48.1 | length 7.1
  Top Layer w0.254: IC14.2 IC14.1 54.866,55.671 57.301,58.106 R48.1
NetIC14_3: IC14.3 R47.2 R50.2 | length 7.4
  Top Layer w0.254: IC14.3 50.038,56.108 51.08,57.15 52.324,57.15 52.761,57.587 52.761,58.257 R50.2 R47.2
NetIC14_5: IC14.5 R53.2 R56.2 | length 9
  Top Layer w0.254: IC14.5 48.768,49.809 49.936,48.641 52.07,48.641 52.796,47.915 R56.2 R53.2
NetIC14_6: IC14.6 IC14.7 R54.1 | length 12
  Top Layer w0.254: IC14.6 IC14.7 51.308,50.684 52.567,51.943 55.372,51.943 57.253,50.062 R54.1
NetIC16_2: IC16.2 R59.2 R60.2 | length 5.5
  Top Layer w0.254: IC16.2 99.238,35.935 104.681,35.935 R59.2
NetIC16_3: IC16.3 R63.2 R66.2 | length 5.8
  Top Layer w0.254: IC16.3 100.726,37.211 102.008,38.493 R66.2 R63.2
NetIC16_5: IC16.5 R67.1 R68.2 | length 5
  Top Layer w0.254: R68.2 88.779,38.487 93.802,38.487 IC16.5
NetIC16_6: IC16.6 R61.1 R62.1 | length 5.6
  Top Layer w0.254: R62.1 R61.1 91.274,35.929 92.556,37.211 IC16.6
NetIC17_2: IC17.2 R64.2 R65.2 | length 8.3
  Top Layer w0.254: R64.2 R65.2 119.572,90.105 120.015,89.662 121.981,89.662 IC17.2
NetIC17_3: IC17.3 R71.2 R72.2 | length 8.6
  Top Layer w0.254: R71.2 R72.2 120.338,87.033 121.62,88.315 IC17.3
NetIC17_5: IC17.5 R73.1 R74.2 | length 6.8
  Top Layer w0.254: IC17.5 127.488,87.039 131.138,87.039 R73.1 R74.2
NetIC17_6: IC17.6 R69.1 R70.1 | length 7.4
  Top Layer w0.254: IC17.6 129.552,88.315 131.038,89.801 R69.1 R70.1
NetJ2_2: J2.2 R76.1 | length 7.5
  Top Layer w0.254: R76.1 123.003,71.93 J2.2
NetJ2_3: J2.3 R75.1 R77.1 | length 10.5
  Top Layer w0.254: R75.1 R77.1 124.333,74.358 125.961,72.73 J2.3
NetLEDT1_1: LEDT1.2 R14.2 | length 2.7
  Bottom Layer w0.254: R14.2 LEDT1.2
NetLEDT2_1: LEDT2.2 R21.2 | length 2.6
  Bottom Layer w0.508: LEDT2.2 R21.2
NetLEDT3_1: LEDT3.2 R36.2 | length 2.4
  Bottom Layer w0.381: R36.2 LEDT3.2
NetLEDT4_1: LEDT4.2 R37.2 | length 3.3
  Top Layer w0.254: R37.2 LEDT4.2
NetLEDT5_1: LEDT5.2 R38.2 | length 3.3
  Top Layer w0.254: R38.2 LEDT5.2
NetLEDT6_1: LEDT6.2 R39.2 | length 3.3
  Top Layer w0.254: R39.2 LEDT6.2
NetLEDT7_1: LEDT7.2 R40.2 | length 3.3
  Top Layer w0.254: R40.2 LEDT7.2
NetLEDT8_2: LEDT8.1 R51.2 | length 2.7
  Bottom Layer w0.254: R51.2 LEDT8.1
NetR78_1: R78.1 Z1.2 | length 2.8
  Bottom Layer w0.381: Z1.2 R78.1
NetR79_1: R79.1 Z2.2 | length 2.8
  Bottom Layer w0.381: Z2.2 R79.1
NetR80_1: R80.1 Z3.2 | length 2.6
  Top Layer w0.381: Z3.2 R80.1
NetR81_1: R81.1 Z4.2 | length 2.7
  Top Layer w0.381: R81.1 Z4.2
oscopeADC1: IC1.24 R78.2 R88.2 R89.1 | length 20
  Top Layer w0.254: v2(87.376,57.912) 87.415,57.873 IC1.24
  Top Layer w0.381: R89.1 R88.2 v2(87.376,57.912)
  Bottom Layer w0.381: R78.2 76.173,55.614 78.471,57.912 v2(87.376,57.912)
oscopeADC1Double: IC15.14 R88.1 | length 9.1
  Top Layer w0.254: IC15.14 80.366,65.278 82.931,62.713 82.931,58.659 83.578,58.012 R88.1
oscopeADC2: IC1.23 R79.2 R90.2 R91.1 | length 19.4
  Top Layer w0.254: R91.1@84.086,60.325 84.086,60.273 85.431,58.928 88.773,58.928 89.328,58.373 IC1.23 ; R91.1 R90.2
  Bottom Layer w0.381: R79.2 86.983,55.614 88.265,56.896 v2(88.265,58.928)
oscopeADC2Double: IC15.15 R90.1 | length 7.3
  Top Layer w0.254: IC15.15 81.749,66.548 85.586,62.711 R90.1
oscopeADC3: IC1.25 R80.2 R92.2 R93.1 | length 24.7
  Top Layer w0.254: R80.2 72.746,53.328 73.152,53.328 ; 73.14,53.34 73.152,53.328 ; IC1.25 90.012,57.373 85.967,53.328 78.486,53.328 77.47,53.328 76.454,53.328 76.073,53.328 75.438,53.328 73.152,53.328
oscopeADC3Double: IC15.4 R92.1 | length 11.1
  Top Layer w0.254: IC15.4 74.916,64.008 78.455,60.469 78.455,54.852 R92.1 R92.1@78.474,54.864
oscopeADC4: IC1.26 R81.2 R94.2 R95.1 | length 32.5
  Top Layer w0.254: R95.1 R94.2 72.898,39.866 74.271,38.493 R81.2 76.974,38.493 85.09,46.609 85.09,47.879 92.298,55.087 IC1.26